# EAGLE board PB1.Eagle-1 (EAGLE 9.6.0)
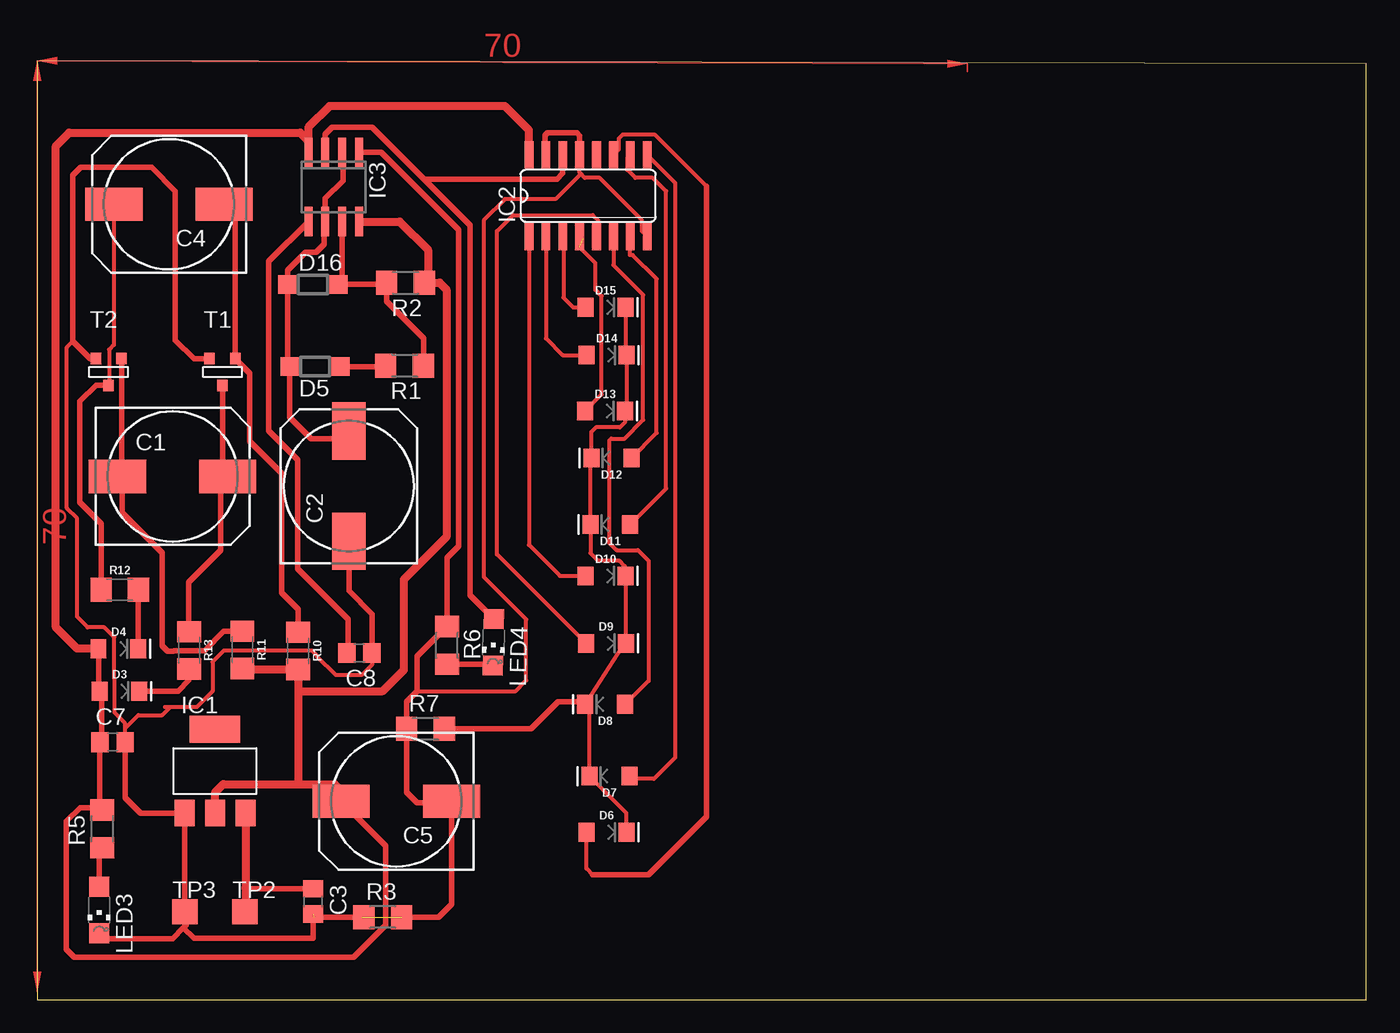
[diagram p0: board, top side]

Size 100 x 70.6 mm. Coordinates in mm from the lower left corner, seen from the top.
Outline: 0,0 100,0 100,70.4 0,70.6 0,0
Copper layers (1*16): Top 0.035mm / dielectric 1.5mm / Bottom 0.035mm
Design rules "default *": minimum track width 6mil, minimum drill 0.35mm, track to track 6mil, track to pad 6mil, pad to pad 6mil, via to via 6mil, smd to smd 6mil, copper to edge 40mil, drill to drill 6mil, minimum pad ring 10mil, minimum via ring 8mil, stop-mask expansion 4mil, vias tented up to drill 0mil, thermal gap 10mil

## Footprints (pad centres in the part's own frame; a part is rotated, then mirrored left to right if it is on the bottom)
150CLZ-1010 = smd 4.3 x 2.5: + 4.15,0; - -4.15,0
C0805 = smd 1.3 x 1.5: 1 -0.95,0; 2 0.95,0
LED-1206 = smd 1.2 x 1.4: A -1.5,0; C 1.5,0
SOD123 = smd 1.4 x 1.4: A 1.9,0; C -1.9,0
SOT223 = smd 1.499 x 2.007: 1 -2.261,-3.15; 2 0.025,-3.15; 3 2.311,-3.15 | smd 3.81 x 2.007: 4 0,3.15
SO16 = smd 0.66 x 2.032: 1 -4.445,-3.073; 2 -3.175,-3.073; 3 -1.905,-3.073; 4 -0.635,-3.073; 5 0.635,-3.073; 6 1.905,-3.073; 7 3.175,-3.073; 8 4.445,-3.073; 9 4.445,3.073; 10 3.175,3.073; 11 1.905,3.073; 12 0.635,3.073; 13 -0.635,3.073; 14 -1.905,3.073; 15 -3.175,3.073; 16 -4.445,3.073
SO08 = smd 0.6 x 2.2: 1 -1.905,-2.6; 2 -0.635,-2.6; 3 0.635,-2.6; 4 1.905,-2.6; 5 1.905,2.6; 6 0.635,2.6; 7 -0.635,2.6; 8 -1.905,2.6
CHIPLED_1206 = smd 1.5 x 1.5: A 0,-1.75; C 0,1.75
R1206 = smd 1.6 x 1.803: 1 -1.422,0; 2 1.422,0
1206 = smd 1.6 x 1.8: 1 -1.4,0; 2 1.4,0
SOT-23 = smd 0.787 x 0.889: 1 0.025,-1.016; 2 -0.94,1.016; 3 0.991,1.016
TP19SQ = smd 1.9 x 1.9: TP 0,0

## Placement (x,y rotation side)
C1  10uF  [150CLZ-1010]  10.19,39.35 0 top
C2  100uF  [150CLZ-1010]  23.45,38.62 90 top
C3  100nF  [C0805]  20.76,7.38 270 top
C4  10uF  [150CLZ-1010]  9.92,59.82 180 top
C5  10uF  [150CLZ-1010]  27.02,14.91 180 top
C7  100nF  [C0805]  5.67,19.36 0 top
C8  10nF  [C0805]  24.24,26.07 180 top
D3  [LED-1206]  6.19,23.19 0 top
D4  [LED-1206]  6.11,26.39 0 top
D5  [SOD123]  20.91,47.61 180 top
D6  [LED-1206]  42.83,12.59 0 top
D7  [LED-1206]  43.05,16.81 180 top
D8  [LED-1206]  42.73,22.21 180 top
D9  [LED-1206]  42.79,26.79 0 top
D10  [LED-1206]  42.76,31.87 0 top
D11  [LED-1206]  43.12,35.73 180 top
D12  [LED-1206]  43.2,40.73 180 top
D13  [LED-1206]  42.72,44.27 0 top
D14  [LED-1206]  42.84,48.47 0 top
D15  [LED-1206]  42.76,52.07 0 top
D16  [SOD123]  20.74,53.79 0 top
IC1  REG1117  [SOT223]  13.37,17.19 0 top
IC2  4017D  [SO16]  41.45,60.46 0 top
IC3  LM555D  [SO08]  22.31,61.12 180 top
LED3  [CHIPLED_1206]  4.66,6.73 180 top
LED4  [CHIPLED_1206]  34.33,26.86 178.8 top
R1  1K  [R1206]  27.64,47.69 180 top
R2  1K  [R1206]  27.71,53.92 180 top
R3  0R  [R1206]  26,6.2 0 top
R5  100R  [R1206]  4.88,12.84 90 top
R6  100R  [R1206]  30.83,26.64 270 top
R7  100R  [R1206]  29.22,20.36 0 top
R10  100K  [1206]  19.64,26.23 270 top
R11  100K  [1206]  15.44,26.31 270 top
R12  100R  [1206]  6.21,30.84 0 top
R13  100R  [1206]  11.44,26.27 270 top
T1  FMMT617  [SOT-23]  13.91,47.2 0 top
T2  FMMT617  [SOT-23]  5.35,47.2 0 top
TP2  TPTP19SQ  [TP19SQ]  15.63,6.61 0 top
TP3  TPTP19SQ  [TP19SQ]  11.11,6.61 0 top

## Library data of the parts
C1-C5 C7 C8 = rcl; SPICEPREFIX: C
D3 D4 D6-D15 = SparkFun-LED
D5 D16 = diode
IC1 = burr-brown; MPN: REG1117; OC_FARNELL: 1097566; OC_NEWARK: 14P6981
IC2 = 40xx
IC3 = linear
LED3 LED4 = led
R1-R3 R5-R7 = rcl; SPICEPREFIX: R
R10-R13 = SparkFun-Resistors; PROD_ID: RES-08705
T1 T2 = zetex; MPN: FMMT617; OC_FARNELL: 9526420; OC_NEWARK: 96K9966
TP2 TP3 = testpad

## Nets
555_OUT: IC2.14 IC3.3 LED4.A
GND: C2.- C3.2 C5.- C7.2 C8.1 IC1.1 IC2.8 IC2.13 IC2.15 IC3.1 LED3.C R3.1 R3.2 R6.1 R7.1 T1.2 T2.2 TP3.TP
N$1: D4.C R12.2
N$2: C4.+ R12.1 T2.1
N$3: C3.1 IC1.3 TP2.TP
N$4: D3.C R13.2
N$5: C1.+ R13.1 T1.1
N$6: C4.- R10.1 T1.3
N$7: C1.- R11.1 T2.3
N$8: LED3.A R5.1
N$9: C8.2 IC3.5
N$12: LED4.C R6.2
N$15: D6.C D7.C D8.C D9.C D10.C D11.C D12.C D13.C D14.C D15.C R7.2
N$16: D16.A IC3.7 R1.1 R2.2
N$18: C2.+ D5.A D16.C IC3.2 IC3.6
N$20: D5.C R1.2
Q0: D15.A IC2.3
Q1: D14.A IC2.2
Q2: D13.A IC2.4
Q3: D12.A IC2.7
Q4: D11.A IC2.10
Q5: D10.A IC2.1
Q6: D9.A IC2.5
Q7: D8.A IC2.6
Q8: D7.A IC2.9
Q9: D6.A IC2.11
VCC: C5.+ C7.1 D3.A D4.A IC1.2 IC2.16 IC3.4 IC3.8 R2.1 R5.2 R10.2 R11.2

## Tracks (layer width: path | path; a pad name or v marks a point on that pad's centre or on a via)
555_OUT
  Top 0.406: LED4.A 32.57,30.41 32.57,58.23 29.1,61.7 | 29.1,61.7 25.2,65.6 22.2,65.6 21.68,65.08 IC3.3 | IC2.14 39.55,62.14 39.1,61.7 29.1,61.7
GND  (3 unrouted)
  Top 0.152: IC2.15 38.14,63.61 38.14,64.41 38.2,64.41 | 25.34,26.27 C8.1 | 11.2,5.6 11.2,5.73 11.2,6.54 TP3.TP
  Top 0.305: IC2.8 45.49,57.79 45.49,58.62 42.31,61.8 41.2,61.8 40.9,62.1 | 40.9,62.1 40.81,62.19 IC2.13 | C8.1 25.19,25.19 24.4,24.4 22.47,24.4 21.07,25.8 21.07,25.85 20.68,26.24 14.04,26.24 13.2,25.4 13.2,23.2 12,22 10,22 | 10,22 9.6,22 | 10,22 9.4,21.4 7.6,21.4 6.62,20.42 C7.2 6.62,20.78 5.82,21.58 5.82,24.11 5.8,24.13 5.8,27.25 5.05,28 3.8,28 3,28.8 3,36.2 2.24,36.96 2.24,49.06 2.69,49.51 | 40.9,62.1 39,60.2 35.2,60.2 33.6,58.6 33.6,31.8 36.8,28.6 36.8,24 36,23.2 28.6,23.2
  Top 0.406: TP3.TP IC1.1 11.07,14 7.8,14 6.62,15.18 C7.2 | LED3.C 5.06,4.58 10.18,4.58 11,5.4 | 11,5.4 11.2,5.6 | IC3.1 25.88,63.72 31.69,57.91 31.69,34.09 30.83,33.23 R6.1 28.6,25.83 28.6,23.2 27.8,22.4 R7.1 27.8,15.6 28.6,14.8 31.06,14.8 C5.- 31.17,7.17 30.2,6.2 R3.2 | IC2.13 40.81,64.98 40.6,65.2 38.4,65.2 38.2,65 38.2,64.41 38.2,64.4 | C2.- 23.45,30.75 25.2,29 C8.1 | T2.2 3.98,48.22 2.69,49.51 2.69,62 3.29,62.6 8.6,62.6 10.4,60.8 10.4,49.6 11.8,48.2 12.95,48.2 T1.2 | 11,5.4 11.8,4.6 20.76,4.6 C3.2 | 20.8,6.2 24.4,6.2
  Top 0.61: R7.1 27.6,20.16
N$1
  Top 0.406: D4.C R12.2
N$2
  Top 0.305: C4.+ 5.77,49.24 5.41,48.88 5.41,46.22 T2.1
  Top 0.406: R12.1 4.81,35.79 3.2,37.4 3.2,45 4.42,46.22 5.41,46.22
  Top 0.61: 5.21,59.26 C4.+
N$3
  Top 0.406: C3.1 15.75,8.33 15.68,8.4
  Top 0.61: 15.63,6.83 TP2.TP 15.68,6.66 15.68,8.4 IC1.3
N$4
  Top 0.406: D3.C 10.59,23.19 11.4,24 11.4,24.83
  Top 0.61: D3.C | 11.4,24.83 R13.2
N$5
  Top 0.406: 11.44,27.21 R13.1 11.4,27.71 11.4,31.4 13.8,33.8 13.8,38.81 C1.+ 13.94,39.76 T1.1
N$6
  Top 0.152: C4.- 14.13,59.88 14.67,59.88 14.7,59.9
  Top 0.406: 14.6,60 14.7,59.9 14.9,59.7 T1.3 16,47.12 16,42 18.4,39.6 18.4,30.6 19.64,29.36 R10.1
N$7
  Top 0.305: 6.24,48.32 T2.3
  Top 0.406: T2.3 6.34,46.88 6.35,46.87 6.35,39.66 C1.- 6.4,38.99 6.4,36.6 9.4,33.6 9.4,26.6 9.8,26.2 10.24,26.2 10.3,26.25 12.58,26.25 14.04,27.71 R11.1
N$8
  Top 0.406: LED3.A 4.66,11.2 R5.1
N$9
  Top 0.406: IC3.5 17.4,55.52 17.4,42.8 19.6,40.6 19.6,32.4 23.4,28.6 23.4,26.18 C8.2
N$12
  Top 0.406: R6.2 34.19,25.22 LED4.C
N$15
  Top 0.305: D15.C 44.26,48.55 D14.C 44.34,44.39 D13.C 44.22,43.42 43.84,43.04 42.04,43.04 41.7,42.7 D12.C 41.62,40.65 D11.C 41.62,33.58 42.2,33 43.8,33 44.2,32.6 44.2,31.93 D10.C 44.26,27.2 | 44.26,27.2 44.26,26.82 D9.C | D8.C 41.33,22.37 | 41.33,22.37 44.37,27.09 44.26,27.2 | D6.C 44.33,14.03 D7.C 41.55,22.16 41.33,22.37
  Top 0.406: R7.2 37.16,20.36 39.2,22.4 41.3,22.4 41.33,22.37
N$16
  Top 0.406: R2.2 26.29,53.6 | 26.29,53.6 26.29,52.51 29.06,49.74 R1.1 | D16.A 23,53.79 | 23,53.79 26.1,53.79 26.29,53.6 | IC3.7 22.95,53.84 23,53.79
N$18
  Top 0.152: IC3.2 22.94,63.61 22.94,62.81 23,62.8 | IC3.6 21.6,58.28 21.6,57.74 21.6,57.6 | 23,42.2 23.2,42.27 23.2,42.54 C2.+
  Top 0.406: IC3.6 21.68,60.28 23,61.6 23,62.8 | 21.6,57.6 21.6,56.8 21,56.2 20.2,56.2 18.84,54.84 D16.C 18.84,47.78 D5.A 19.01,43.79 20.6,42.2 23,42.2
N$20
  Top 0.406: D5.C 26.14,47.61 R1.2
Q0
  Top 0.305: IC2.3 39.6,57.33 39.6,52.8 40.33,52.07 D15.A
Q1
  Top 0.305: IC2.2 38.27,49.73 39.53,48.47 D14.A
Q2  (1 unrouted)
  Top 0.152: 41.07,57.21 IC2.4
  Top 0.305: D13.A 42.47,45.52 42.47,52.91 42,53.38 42,55.4 40.8,56.6
Q3
  Top 0.305: D12.A 46.6,42.63 46.6,54.2 44.8,56 44.6,56 44.6,57.36 IC2.7
Q4
  Top 0.305: D11.A 47.31,38.42 47.31,60.8 46.31,61.8 45,61.8 44.4,62.4 44.4,63.31 IC2.10
Q5
  Top 0.305: IC2.1 37.01,34.2 39.33,31.87 D10.A
Q6
  Top 0.152: IC2.5 42.14,57.47 42.14,58.01 42.2,58.01
  Top 0.305: D9.A 34.6,33.48 34.6,57.8 35.8,59 41.8,59 42.2,58.6 42.2,58.01 42.2,58
Q7
  Top 0.305: IC2.6 43.35,55.25 45.6,53 45.6,43.6 44.2,42.2 43.2,42.2 43.06,42.06 43.06,34.34 43.6,33.8 45.2,33.8 46,33 46,23.98 D8.A
Q8
  Top 0.305: IC2.9 48,61.43 48,18.2 46.4,16.6 44.76,16.6 D7.A
Q9
  Top 0.305: IC2.11 43.76,63.94 43.76,64.77 44.07,65.08 46.45,65.08 50.36,61.16 50.4,61.13 | 41.8,9.4 41.33,9.87 D6.A
  Top 0.406: 41.8,9.4 46,9.4 50.36,13.76 50.36,61.16
VCC
  Top 0.152: IC3.4 20.54,63.88 20.54,64.41 20.4,64.6 | C5.+ 22.94,15.07 22.94,15.6 22.8,15.8
  Top 0.406: D3.A 4.8,23.08 | D4.A 4.61,23.27 D3.A | 4.69,19.39 C7.1 | C7.1 4.84,19.24 4.84,23.04 D3.A | C7.1 4.72,14.42 | 4.72,14.42 R5.2 | C5.+ 26.2,11.58 26.2,5.6 23.8,3.2 2.8,3.2 2.2,3.8 2.2,13.4 3.22,14.42 4.72,14.42
  Top 0.61: IC1.2 13.39,15.59 14,16.2 19.8,16.2 | 19.8,16.2 22.4,16.2 22.8,15.8 | R5.2 4.84,14.3 | 19.64,23.2 R10.2 15.52,24.83 R11.2 | 19.64,23.2 19.64,16.36 19.8,16.2 | 19.64,23.2 26,23.2 27.6,24.8 27.6,31.6 30.8,34.8 30.8,53.4 30.28,53.92 R2.1 29.4,54.19 29.4,56.4 27.28,58.52 IC3.8 | D4.A 3.01,26.39 1.4,28 1.4,64.2 2.4,65.2 19.8,65.2 20.4,64.6 20.4,65.6 22,67.2 35.2,67.2 37.01,65.39 IC2.16
(copper drawn outside any net)
  shapes: Top area x2